# EAGLE board CT_schematic (EAGLE 7.6.0)

Size 100 x 80 mm. Coordinates in mm from the lower left corner, seen from the top.
Outline: 0,0 100,0 100,80 0,80 0,0
Copper layers (1*16): Top 0.035mm / dielectric 1.5mm / Bottom 0.035mm
Design rules "default": minimum track width 10mil, minimum drill 24mil, track to track 8mil, track to pad 8mil, pad to pad 8mil, via to via 8mil, smd to smd 8mil, copper to edge 40mil, drill to drill 8mil, minimum pad ring 10mil, minimum via ring 8mil, stop-mask expansion 4mil, vias tented up to drill 0mil, thermal gap 10mil

## Footprints (pad centres in the part's own frame; a part is rotated, then mirrored left to right if it is on the bottom)
C0603 = smd 0.8 x 0.8: 1 -0.762,0; 2 0.762,0
C0402 = smd 0.5 x 0.5: 1 -0.508,0; 2 0.508,0
C0805 = smd 1.2 x 1.3: 1 -1.016,0; 2 1.016,0
EXV-9B = smd 2.718 x 1.778: 1 -2.108,0; 2 2.108,0
EXV-9H = smd 3.505 x 1.676: 1 -2.857,0; 2 2.857,0
L0603 = smd 0.8 x 0.8: 1 -0.762,0; 2 0.762,0
PJ-037B_PACKAGE = drill 3.7 square: 1 12,0 | drill 3.2 square: 2 6,0
R0603 = smd 0.8 x 0.8: 1 -0.762,0; 2 0.762,0
UFBGA132 = smd 0.32 x 0.32: A1 -2.75,2.75; A2 -2.25,2.75; A3 -1.75,2.75; A4 -1.25,2.75; A5 -0.75,2.75; A6 -0.25,2.75; A7 0.25,2.75; A8 0.75,2.75; A9 1.25,2.75; A10 1.75,2.75; A11 2.25,2.75; A12 2.75,2.75; B1 -2.75,2.25; B2 -2.25,2.25; B3 -1.75,2.25; B4 -1.25,2.25; B5 -0.75,2.25; B6 -0.25,2.25; B7 0.25,2.25; B8 0.75,2.25; B9 1.25,2.25; B10 1.75,2.25; B11 2.25,2.25; B12 2.75,2.25; C1 -2.75,1.75; C2 -2.25,1.75; C3 -1.75,1.75; C4 -1.25,1.75; C5 -0.75,1.75; C6 -0.25,1.75; C7 0.25,1.75; C8 0.75,1.75; C9 1.25,1.75; C10 1.75,1.75; C11 2.25,1.75; C12 2.75,1.75; D1 -2.75,1.25; D2 -2.25,1.25; D3 -1.75,1.25; D4 -1.25,1.25; D5 -0.75,1.25; D6 -0.25,1.25; D7 0.25,1.25; D8 0.75,1.25; D9 1.25,1.25; D10 1.75,1.25; D11 2.25,1.25; D12 2.75,1.25; E1 -2.75,0.75; E2 -2.25,0.75; E3 -1.75,0.75; E4 -1.25,0.75; E9 1.25,0.75; E10 1.75,0.75; E11 2.25,0.75; E12 2.75,0.75; F1 -2.75,0.25; F2 -2.25,0.25; F3 -1.75,0.25; F4 -1.25,0.25; F6 -0.25,0.25; F7 0.25,0.25; F9 1.25,0.25; F10 1.75,0.25; F11 2.25,0.25; F12 2.75,0.25; G1 -2.75,-0.25; G2 -2.25,-0.25; G3 -1.75,-0.25; G4 -1.25,-0.25; G6 -0.25,-0.25; G7 0.25,-0.25; G9 1.25,-0.25; G10 1.75,-0.25; G11 2.25,-0.25; G12 2.75,-0.25; H1 -2.75,-0.75; H2 -2.25,-0.75; H3 -1.75,-0.75; H4 -1.25,-0.75; H9 1.25,-0.75; H10 1.75,-0.75; H11 2.25,-0.75; H12 2.75,-0.75; J1 -2.75,-1.25; J2 -2.25,-1.25; J3 -1.75,-1.25; J4 -1.25,-1.25; J5 -0.75,-1.25; J6 -0.25,-1.25; J7 0.25,-1.25; J8 0.75,-1.25; J9 1.25,-1.25; J10 1.75,-1.25; J11 2.25,-1.25; J12 2.75,-1.25; K1 -2.75,-1.75; K2 -2.25,-1.75; K3 -1.75,-1.75; K4 -1.25,-1.75; K5 -0.75,-1.75; K6 -0.25,-1.75; K7 0.25,-1.75; K8 0.75,-1.75; K9 1.25,-1.75; K10 1.75,-1.75; K11 2.25,-1.75; K12 2.75,-1.75; L1 -2.75,-2.25; L2 -2.25,-2.25; L3 -1.75,-2.25; L4 -1.25,-2.25; L5 -0.75,-2.25; L6 -0.25,-2.25; L7 0.25,-2.25; L8 0.75,-2.25; L9 1.25,-2.25; L10 1.75,-2.25; L11 2.25,-2.25; L12 2.75,-2.25; M1 -2.75,-2.75; M2 -2.25,-2.75; M3 -1.75,-2.75; M4 -1.25,-2.75; M5 -0.75,-2.75; M6 -0.25,-2.75; M7 0.25,-2.75; M8 0.75,-2.75; M9 1.25,-2.75; M10 1.75,-2.75; M11 2.25,-2.75; M12 2.75,-2.75
M41T65_QFN-16 = smd 0.775 x 0.305: 1 -1.387,0.75; 2 -1.387,0.25; 3 -1.387,-0.25; 4 -1.387,-0.75; 9 1.387,-0.75; 10 1.387,-0.25; 11 1.387,0.25; 12 1.387,0.75 | smd 0.305 x 0.775: 5 -0.75,-1.387; 6 -0.25,-1.387; 7 0.25,-1.387; 8 0.75,-1.387; 13 0.75,1.387; 14 0.25,1.387; 15 -0.25,1.387; 16 -0.75,1.387 | smd 1.6 x 1.6: 17 0,0
SOIC-8 = smd 1.6 x 0.6: 1 -2.7,1.905 | smd 1.55 x 0.6: 2 -2.7,0.635; 3 -2.7,-0.635; 4 -2.7,-1.905; 5 2.7,-1.905; 6 2.7,-0.635; 7 2.7,0.635; 8 2.7,1.905
FCI_10118193-0001LF = smd 0.4 x 1.35: 1 -1.3,2.675; 2 -0.65,2.675; 3 0,2.675; 4 0.65,2.675; 5 1.3,2.675 | smd 1.6 x 1.4: 6 -3.2,2.45; 7 3.2,2.45 | smd 1.9 x 1.9: 8 -1.2,0; 9 1.2,0 | hole 0.5: -3.3,0; 3.3,0
SOT143B = smd 1 x 0.7: 1 -0.75,-1 | smd 0.6 x 0.7: 2 0.95,-1; 3 0.95,1; 4 -0.95,1
ABS07-32.768KHZ-7-T = smd 1.1 x 2.4: 1 -2.5,0; 2 0,0
ASFL1 = smd 1.7 x 1.5: 1 -1.27,-1.1; 2 1.27,-1.1; 3 1.27,1.1; 4 -1.27,1.1
LP2954 = smd 1.6 x 0.6: 1 -2.475,1.905 | smd 1.55 x 0.6: 2 -2.475,0.635; 3 -2.475,-0.635; 4 -2.475,-1.905; 5 2.475,-1.905; 6 2.475,-0.635; 7 2.475,0.635; 8 2.475,1.905
SON-6 = smd 0.55 x 0.3: 1 -0.355,0.5 | smd 0.52 x 0.3: 2 -0.37,0; 3 -0.37,-0.5; 4 0.37,-0.5; 5 0.37,0; 6 0.37,0.5
SW_4-1437565-2 = smd 1.4 x 2.1: 1 -2.23,4.55; 2 -2.23,-4.55; 3 2.23,4.55; 4 2.23,-4.55
LGM67K-G1J2-24-Z = smd 0.8 x 1.4: A -2,0; C 0,0
NC7SZ125M5X = smd 1.3 x 0.7: 1 -1.3,0.95; 2 -1.3,0; 3 -1.3,-0.95; 4 1.3,-0.95; 5 1.3,0.95

## Placement (x,y rotation side)
C1  1e-07  [C0603]  -19.05,54.61 0 top  (outside the outline)
C2  1e-07  [C0603]  -22.86,54.61 0 top  (outside the outline)
C3  1e-07  [C0603]  -26.67,54.61 0 top  (outside the outline)
C4  1e-07  [C0603]  -30.48,54.61 0 top  (outside the outline)
C5  1e-07  [C0603]  -34.29,54.61 0 top  (outside the outline)
C6  1e-07  [C0603]  -38.1,54.61 0 top  (outside the outline)
C7  1e-07  [C0603]  -41.91,54.61 0 top  (outside the outline)
C8  4.7e-06  [C0603]  -15.24,54.61 0 top  (outside the outline)
C9  1e-07  [C0603]  -45.72,54.61 0 top  (outside the outline)
C10  1e-08  [C0603]  -49.53,54.61 0 top  (outside the outline)
C11  1e-06  [C0603]  -53.34,54.61 0 top  (outside the outline)
C12  1e-11  [C0402]  -38.1,59.69 0 top  (outside the outline)
C13  1e-11  [C0402]  -41.91,59.69 0 top  (outside the outline)
C14  4.7e-06  [C0805]  -39.37,43.18 0 top  (outside the outline)
C15  1e-08  [C0402]  -45.72,59.69 0 top  (outside the outline)
C16  1e-08  [C0402]  -49.53,59.69 0 top  (outside the outline)
C17  1e-06  [EXV-9B]  -16.51,43.18 0 top  (outside the outline)
C18  2.2e-06  [EXV-9B]  -25.4,43.18 0 top  (outside the outline)
C19  1e-07  [C0402]  -53.34,59.69 0 top  (outside the outline)
C20  0.0001  [EXV-9H]  -29.21,27.94 0 top  (outside the outline)
C21  0.0001  [EXV-9H]  -40.64,27.94 0 top  (outside the outline)
C22  1e-08  [C0402]  -57.15,59.69 0 top  (outside the outline)
F1  240.0  [L0603]  -57.15,54.61 0 top  (outside the outline)
J1  PJ-037B  [PJ-037B_PACKAGE]  -27.94,7.62 0 top  (outside the outline)
R2  1000.0  [R0603]  -60.96,54.61 0 top  (outside the outline)
R4  4700.0  [R0603]  -15.24,59.69 0 top  (outside the outline)
R5  2200.0  [R0603]  -19.05,59.69 0 top  (outside the outline)
R6  2200.0  [R0603]  -22.86,59.69 0 top  (outside the outline)
R7  2200.0  [R0603]  -26.67,59.69 0 top  (outside the outline)
R8  2200.0  [R0603]  -30.48,59.69 0 top  (outside the outline)
R9  10000.0  [R0603]  -25.4,49.53 0 top  (outside the outline)
R10  10000.0  [R0603]  -30.48,49.53 0 top  (outside the outline)
R11  10000.0  [R0603]  -35.56,49.53 0 top  (outside the outline)
R12  10000.0  [R0603]  -40.64,49.53 0 top  (outside the outline)
R13  10000.0  [R0603]  -45.72,49.53 0 top  (outside the outline)
R14  10000.0  [R0603]  -50.8,49.53 0 top  (outside the outline)
R15  100000.0  [R0603]  -49.53,43.18 0 top  (outside the outline)
R16  100000.0  [R0603]  -54.61,43.18 0 top  (outside the outline)
R17  164658.62  [R0603]  -44.45,43.18 0 top  (outside the outline)
R18  100000.0  [R0603]  -59.69,43.18 0 top  (outside the outline)
R19  10000.0  [R0603]  -55.88,49.53 0 top  (outside the outline)
R20  10000.0  [R0603]  -60.96,49.53 0 top  (outside the outline)
R21  9100.0  [R0603]  -34.29,59.69 0 top  (outside the outline)
R22  680000.0  [R0603]  -15.24,49.53 0 top  (outside the outline)
R23  120000.0  [R0603]  -20.32,49.53 0 top  (outside the outline)
U1  STM32L152QCH6  [UFBGA132]  -60.96,6.35 0 top  (outside the outline)
U2  M41T65Q6F  [M41T65_QFN-16]  -15.24,64.77 0 top  (outside the outline)
U3  24AA1025T-I/SN  [SOIC-8]  -40.64,19.05 0 top  (outside the outline)
U4  10118193-0001LF  [FCI_10118193-0001LF]  -19.05,27.94 0 top  (outside the outline)
U5  prtr5v0u2ax  [SOT143B]  -30.48,64.77 0 top  (outside the outline)
U6  ABS07-32.768KHZ-7-T  [ABS07-32.768KHZ-7-T]  -27.94,36.83 0 top  (outside the outline)
U7  ABS07-32.768KHZ-7-T  [ABS07-32.768KHZ-7-T]  -46.99,36.83 0 top  (outside the outline)
U8  ASFL1-25MHZ-NCS  [ASFL1]  -58.42,19.05 0 top  (outside the outline)
U9  LP2954AIMX/NOPB  [LP2954]  -25.4,19.05 0 top  (outside the outline)
U10  TPS3895ADRYR  [SON-6]  -34.29,63.5 0 top  (outside the outline)
U11  4-1437565-2  [SW_4-1437565-2]  -44.45,6.35 0 top  (outside the outline)
U12  Q65110A2395  [LGM67K-G1J2-24-Z]  -55.88,36.83 0 top  (outside the outline)
U13  nc7sz125m5x  [NC7SZ125M5X]  -33.02,43.18 0 top  (outside the outline)

## Library data of the parts
C1-C22 F1 J1 R2 R4-R23 U1-U13 = circuit_tree

## Nets
CLK_CRYSTAL_U1_D1: C12.1 U1.D1 U7.1
CLK_CRYSTAL_U1_E1: C13.1 U1.E1 U7.2
CLK_CRYSTAL_U2_1: U2.1 U6.1
CLK_CRYSTAL_U2_2: U2.2 U6.2
CLK_U1_F1: U1.F1 U8.3
GND: C1.2 C2.2 C3.2 C4.2 C5.2 C6.2 C7.2 C8.2 C9.2 C10.2 C11.2 C12.2 C13.2 C14.2 C15.2 C16.2 C17.2 C18.2 C19.2 C20.2 C21.2 C22.2 J1.2 R2.2 R9.2 R14.2 R18.2 R21.2 R23.2 U1.D3 U1.E3 U1.F2 U1.F6 U1.F7 U1.F11 U1.F12 U1.J1 U2.3 U2.5 U2.17 U3.4 U3.7 U4.5 U4.6 U4.7 U4.8 U4.9 U5.1 U8.2 U9.4 U10.2 U12.C U13.1 U13.3
NET_U1_A3: R5.1 U1.A3 U2.10
NET_U1_A4: R9.1 U1.A4
NET_U1_B3: R6.1 U1.B3 U2.9
NET_U1_E2: C9.1 U1.E2
NET_U1_H2: R4.1 U1.H2 U13.4
NET_U1_L10: R7.1 U1.L10 U3.6
NET_U1_L11: R8.1 U1.L11 U3.5
NET_U1_M1: C10.1 C11.1 F1.1 U1.L1 U1.M1
NET_U1_M11: U12.A
NET_U1_M12: U11.3 U11.4
NET_U2_4: R10.1 U2.4
NET_U2_11: R11.1 U2.11
NET_U3_1: R13.1 U3.1
NET_U3_2: R14.1 U3.2
NET_U3_3: R12.1 U3.3
NET_U5_4: U4.1 U5.4
NET_U9_3: R16.1 U9.3
NET_U9_5: R15.1 U9.5
NET_U9_7: R17.2 R18.1 U9.7
NET_U10_1: R20.1 R21.1 U10.1
NET_U10_3: R22.2 R23.1 U10.3
NET_U10_4: R19.1 U10.4 U13.2
NET_U11_1: R2.1 U11.1 U11.2
PROC_USB_DM: U1.B12 U4.2 U5.3
PROC_USB_DP: U1.A12 U4.3 U5.2
VCC_S1_14V3: C17.1 C20.1 C21.1 J1.1 R16.2 U9.8
VCC_TIER1_3V3: C1.1 C2.1 C3.1 C4.1 C5.1 C6.1 C7.1 C8.1 C14.1 C15.1 C16.1 C18.1 C19.1 C22.1 F1.2 R4.2 R5.2 R6.2 R7.2 R8.2 R10.2 R11.2 R12.2 R13.2 R15.2 R17.1 R19.2 R20.2 R22.1 U1.C4 U1.G2 U1.G6 U1.G7 U1.G11 U1.G12 U1.H3 U2.14 U3.8 U8.4 U9.1 U10.6 U13.5

## Tracks (layer width: path | path; a pad name or v marks a point on that pad's centre or on a via)
CLK_CRYSTAL_U1_D1  (2 unrouted)
CLK_CRYSTAL_U1_E1  (2 unrouted)
CLK_CRYSTAL_U2_1  (1 unrouted)
CLK_CRYSTAL_U2_2  (1 unrouted)
CLK_U1_F1  (1 unrouted)
GND  (53 unrouted)
NET_U1_A3  (2 unrouted)
NET_U1_A4  (1 unrouted)
NET_U1_B3  (2 unrouted)
NET_U1_E2  (1 unrouted)
NET_U1_H2  (2 unrouted)
NET_U1_L10  (2 unrouted)
NET_U1_L11  (2 unrouted)
NET_U1_M1  (4 unrouted)
NET_U1_M12  (1 unrouted)
NET_U2_4  (1 unrouted)
NET_U2_11  (1 unrouted)
NET_U3_1  (1 unrouted)
NET_U3_2  (1 unrouted)
NET_U3_3  (1 unrouted)
NET_U5_4  (1 unrouted)
NET_U9_3  (1 unrouted)
NET_U9_5  (1 unrouted)
NET_U9_7  (2 unrouted)
NET_U10_1  (2 unrouted)
NET_U10_3  (2 unrouted)
NET_U10_4  (2 unrouted)
NET_U11_1  (2 unrouted)
PROC_USB_DM  (2 unrouted)
PROC_USB_DP  (2 unrouted)
VCC_S1_14V3  (5 unrouted)
VCC_TIER1_3V3  (41 unrouted)